# Altium PCB DigitalMaze.PcbDoc
Units mm, origin at the board's own origin, x right, y up, seen from the top; angles counter-clockwise.
Board outline 40.1 x 40.1 mm, 2 copper layers (Top Layer, Bottom Layer); 17 components, 11 nets, 95 pads, 119 vias.
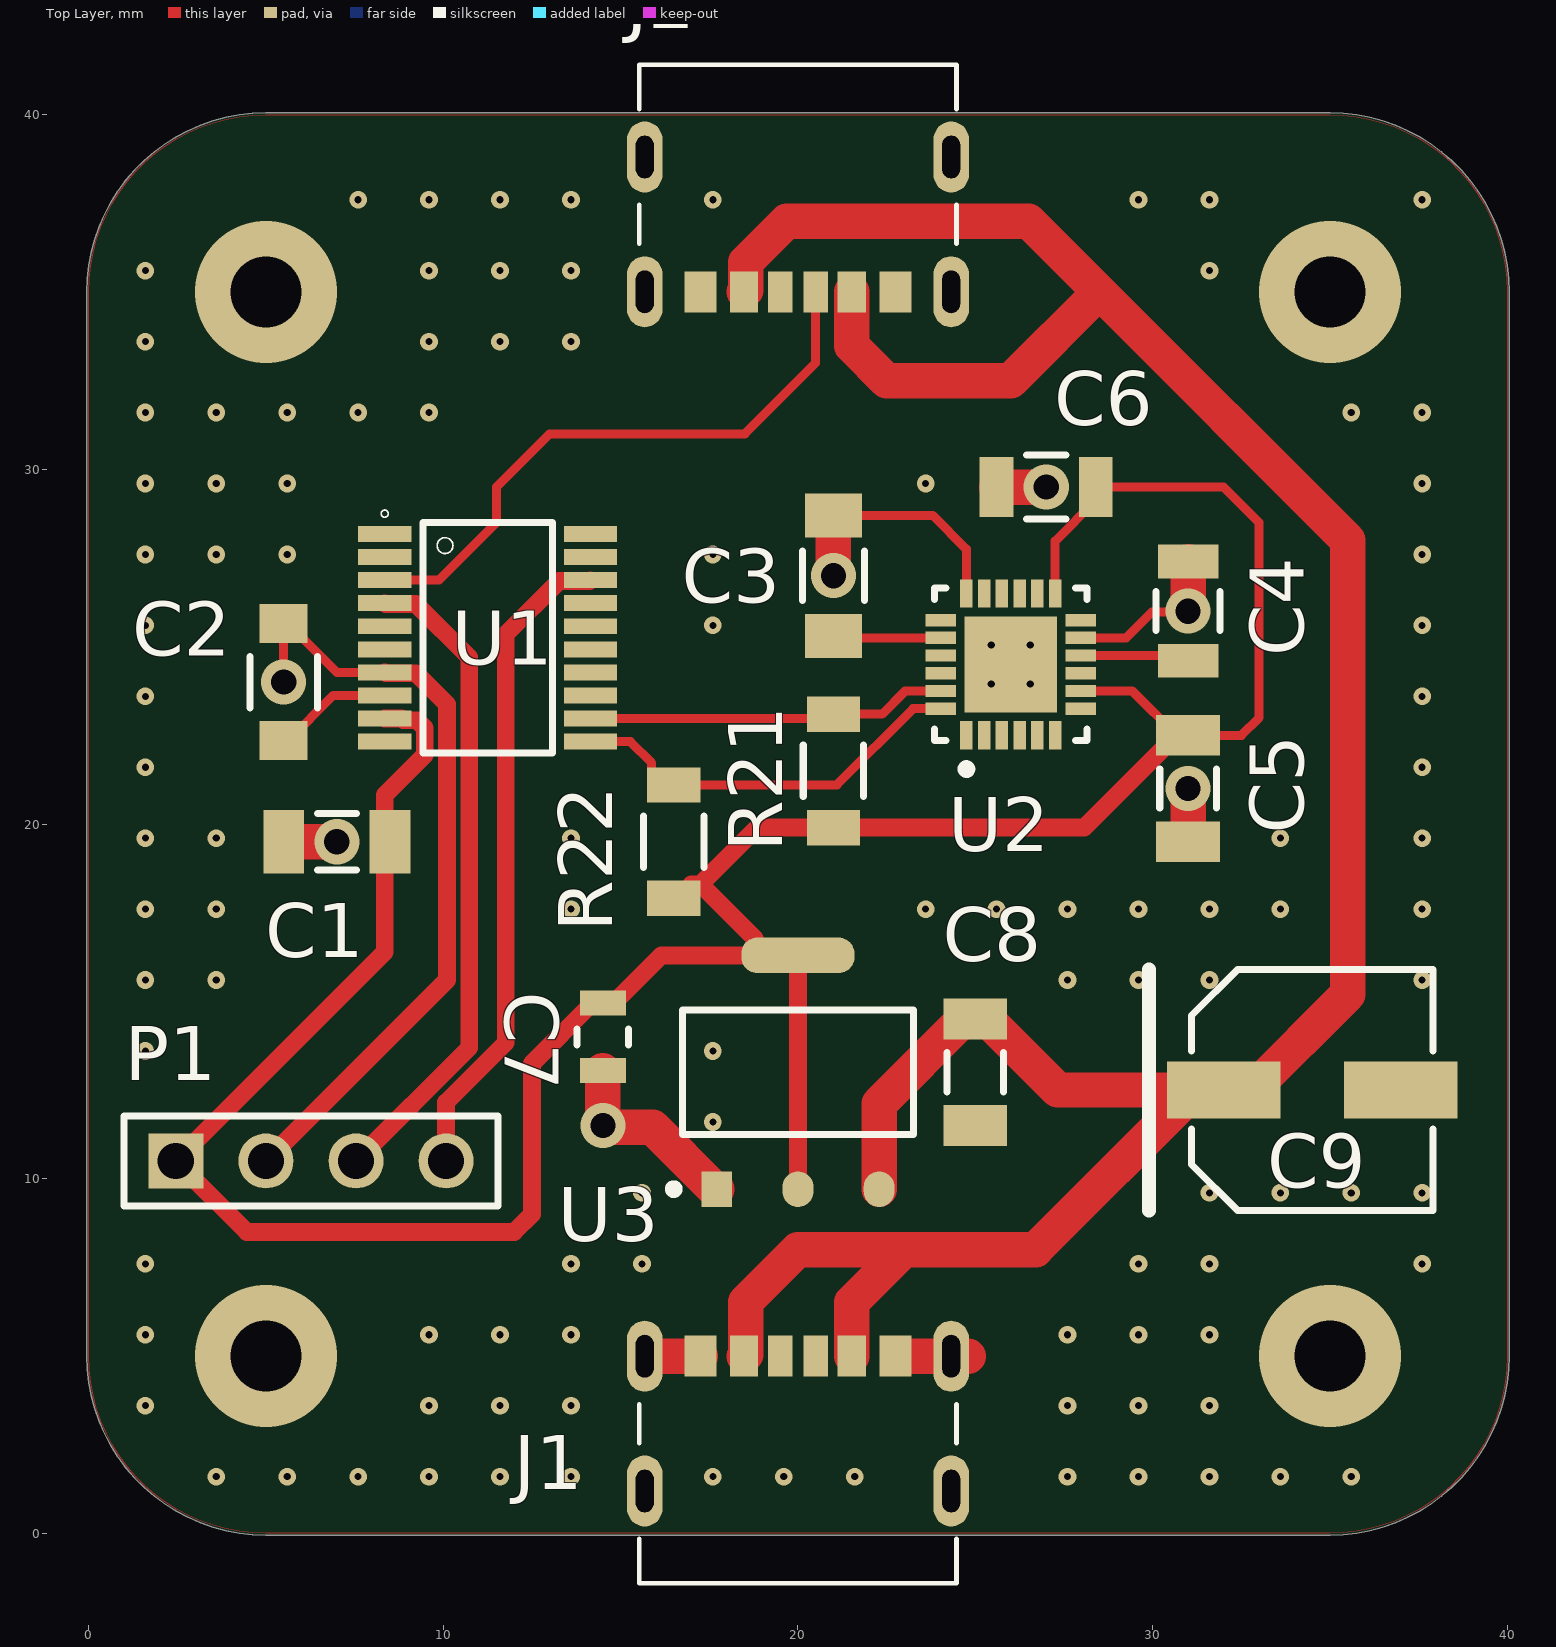
[diagram p0: Top Layer view]
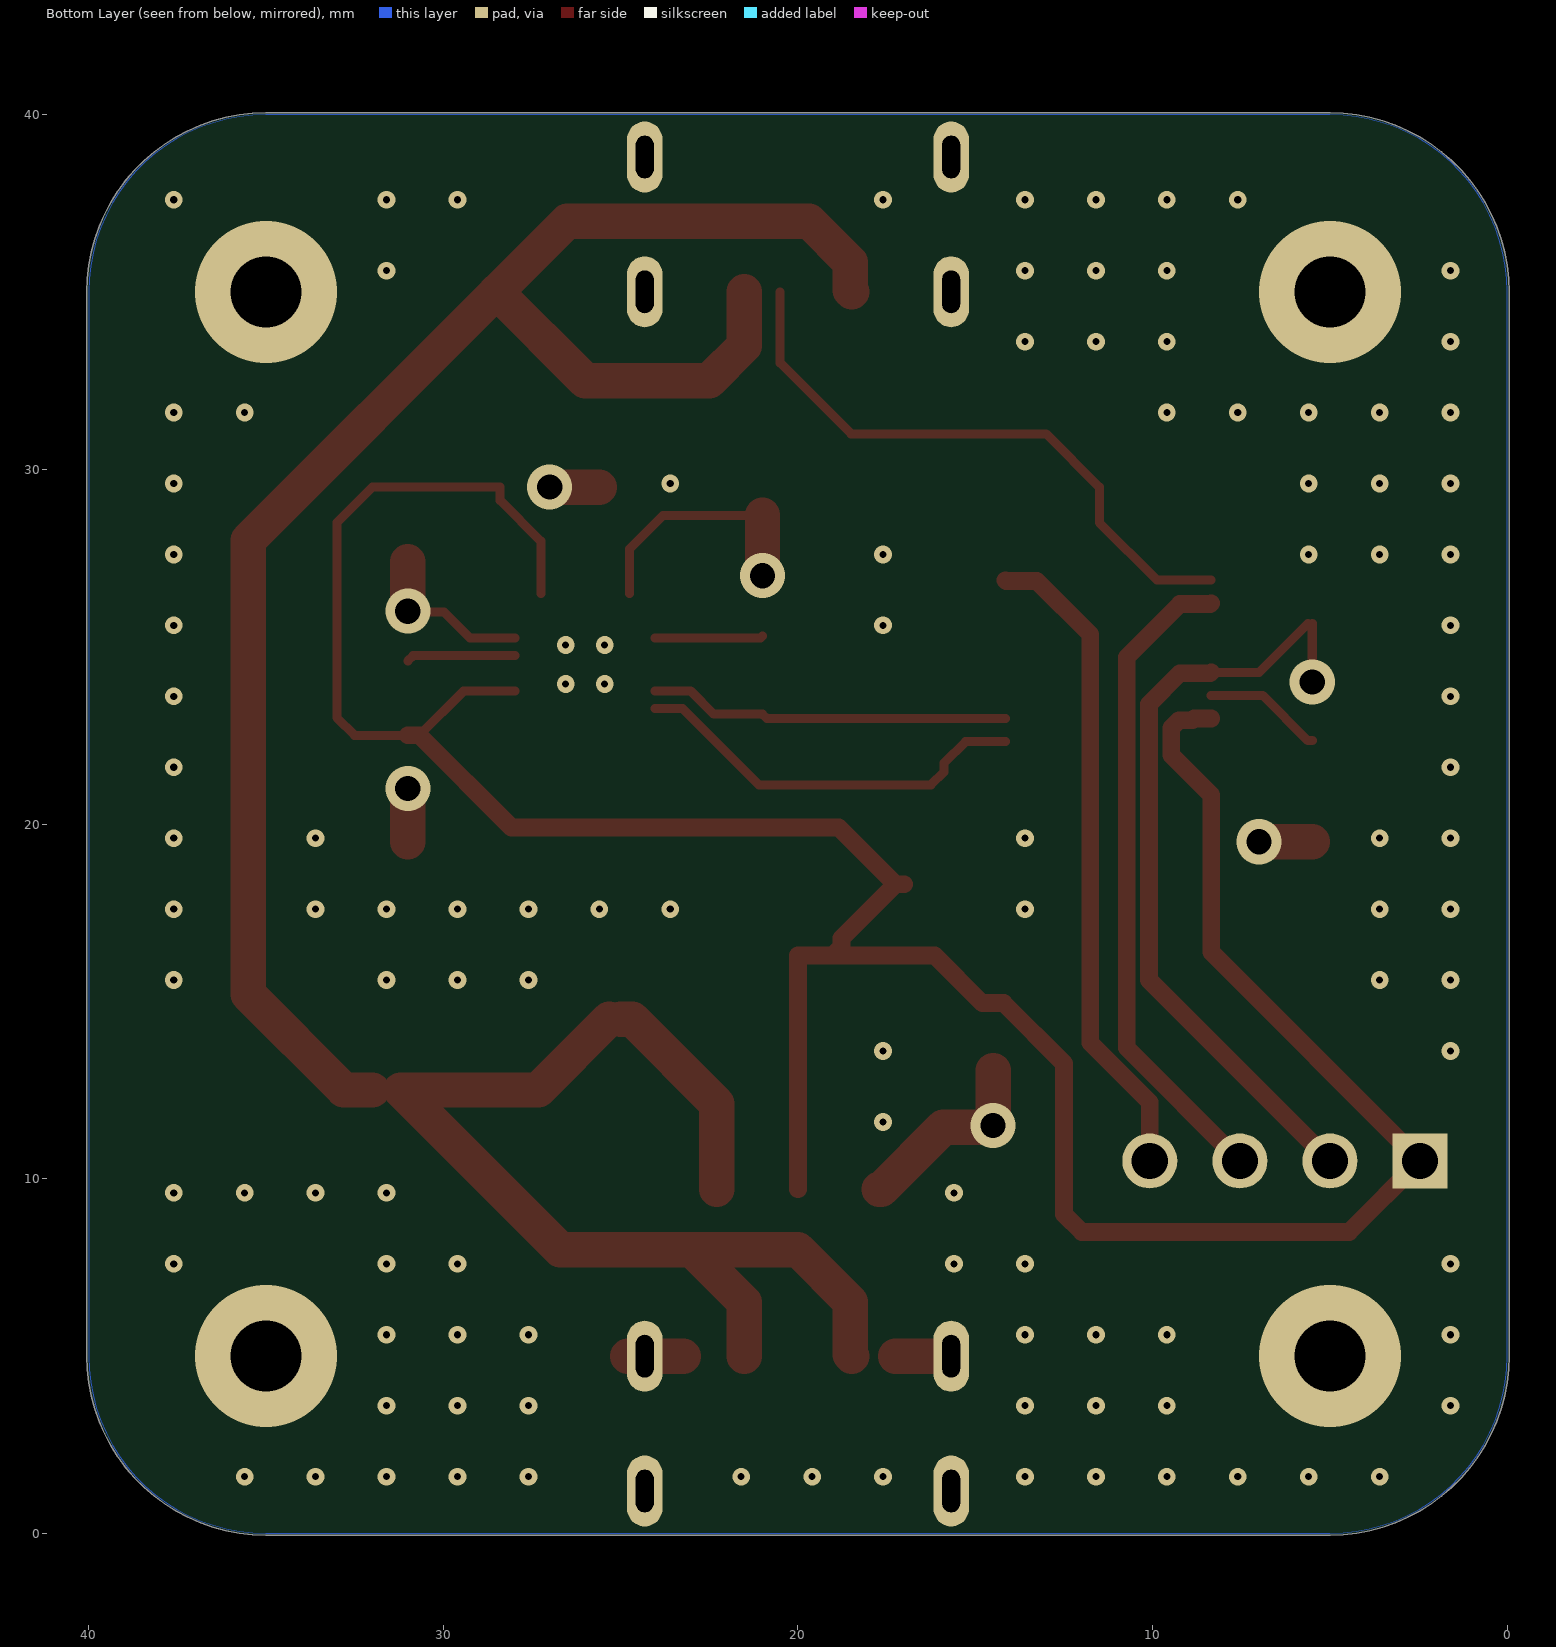
[diagram p1: Bottom Layer view, seen from below]

## Layer stack, top to bottom
Top Solder: solder mask 0.0102, Solder Resist, Dk 3.5
Top Layer: signal copper 0.0356
Dielectric 1: dielectric 0.32, FR-4, Dk 4.8
Bottom Layer: signal copper 0.0356
Bottom Solder: solder mask 0.0102, Solder Resist, Dk 3.5

## Board outline
-0.05,5 -0.05,35 cw(c5,35) 5,40.05 35,40.05 cw(c35,35) 40.05,35 40.05,5 cw(c35,5) 35,-0.05 5,-0.05 cw(c5,5)

## Design rules (kind name [scope] priority, off if disabled: settings)
AssemblyTestPointUsage [All] p0: scope1count=1 scope1_0_kind=Board scope1_0_value=Board scope2count=1 scope2_0_kind=Board scope2_0_value=Board commentlength=0
AssemblyTestpoint [All] p0: scope1count=1 scope1_0_kind=Board scope1_0_value=Board scope2count=1 scope2_0_kind=Board scope2_0_value=Board commentlength=0
Clearance [All] p0: scope1count=1 scope1_0_kind=Board scope1_0_value=Board scope2count=1 scope2_0_kind=Board scope2_0_value=Board commentlength=0 gap=0.127
Clearance [All] p1: gap=0.127 ignorepadtopadclearanceinfootprint=TRUE
ComponentClearance [All] p0: scope1count=1 scope1_0_kind=Board scope1_0_value=Board scope2count=1 scope2_0_kind=Board scope2_0_value=Board commentlength=0 gap=0.254 collisioncheckmode=3
DiffPairsRouting [All] p0: scope1count=1 scope1_0_kind=Board scope1_0_value=Board scope2count=1 scope2_0_kind=Board scope2_0_value=Board commentlength=0
FabricationTestPointUsage [All] p0: scope1count=1 scope1_0_kind=Board scope1_0_value=Board scope2count=1 scope2_0_kind=Board scope2_0_value=Board commentlength=0 valid=0 allowmultiple=FALSE
FabricationTestpoint [All] p0: scope1count=1 scope1_0_kind=Board scope1_0_value=Board scope2count=1 scope2_0_kind=Board scope2_0_value=Board commentlength=0 side=3 testpointundercomponent=TRUE minsize=1.016 maxsize=2.54 preferedsize=1.524 minholesize=0 maxholesize=1.016 preferedholesize=0.813 testpointgrid=0.025
FanoutControl Fanout_BGA [All] p0 off: scope1count=1 scope1_0_kind=Board scope1_0_value=Board scope2count=1 scope2_0_kind=Board scope2_0_value=Board commentlength=69 // Protel DXP Scope 1 Expression Was: IsBGA   Fanout_BGA (Default Rule)
FanoutControl Fanout_LCC [All] p0 off: scope1count=1 scope1_0_kind=Board scope1_0_value=Board scope2count=1 scope2_0_kind=Board scope2_0_value=Board commentlength=69 // Protel DXP Scope 1 Expression Was: IsLCC   Fanout_LCC (Default Rule)
FanoutControl Fanout_SOIC [All] p0 off: scope1count=1 scope1_0_kind=Board scope1_0_value=Board scope2count=1 scope2_0_kind=Board scope2_0_value=Board commentlength=71 // Protel DXP Scope 1 Expression Was: IsSOIC   Fanout_SOIC (Default Rule)
FanoutControl Fanout_Small [All] p0 off: scope1count=1 scope1_0_kind=Board scope1_0_value=Board scope2count=1 scope2_0_kind=Board scope2_0_value=Board commentlength=84 // Protel DXP Scope 1 Expression Was: (CompPinCount < 5)   Fanout_Small (Default Rule)
FanoutControl Fanout_Default [All] p0: scope1count=1 scope1_0_kind=Board scope1_0_value=Board scope2count=1 scope2_0_kind=Board scope2_0_value=Board commentlength=30 // Fanout_Default (Default Rule)
Height [All] p0: scope1count=1 scope1_0_kind=Board scope1_0_value=Board scope2count=1 scope2_0_kind=Board scope2_0_value=Board commentlength=0
HoleSize [All] p0: scope1count=1 scope1_0_kind=Board scope1_0_value=Board scope2count=1 scope2_0_kind=Board scope2_0_value=Board commentlength=0 absolutevalues=TRUE maxlimit=2.54 minlimit=0.025 maxpercent=80.000 minpercent=20.000
HoleToHoleClearance [All] p0: scope1count=1 scope1_0_kind=Board scope1_0_value=Board scope2count=1 scope2_0_kind=Board scope2_0_value=Board commentlength=0
LayerPairs [All] p0: scope1count=1 scope1_0_kind=Board scope1_0_value=Board scope2count=1 scope2_0_kind=Board scope2_0_value=Board commentlength=0 enforce=TRUE
MinimumSolderMaskSliver [All] p0: scope1count=1 scope1_0_kind=Board scope1_0_value=Board scope2count=1 scope2_0_kind=Board scope2_0_value=Board commentlength=0
MinimumSolderMaskSliver [All] p1: minsoldermaskwidth=0.04
NetAntennae [All] p0: scope1count=1 scope1_0_kind=Board scope1_0_value=Board scope2count=1 scope2_0_kind=Board scope2_0_value=Board commentlength=0
PasteMaskExpansion [All] p0: scope1count=1 scope1_0_kind=Board scope1_0_value=Board scope2count=1 scope2_0_kind=Board scope2_0_value=Board commentlength=0 expansion=0
PlaneClearance [All] p0: scope1count=1 scope1_0_kind=Board scope1_0_value=Board scope2count=1 scope2_0_kind=Board scope2_0_value=Board commentlength=0 clearance=0.508
PlaneConnect [All] p0: scope1count=1 scope1_0_kind=Board scope1_0_value=Board scope2count=1 scope2_0_kind=Board scope2_0_value=Board commentlength=0 planeconnectstyle=Relief reliefexpansion=0.508 reliefentries=4 reliefconductorwidth=0.254 reliefairgap=0.254
PolygonConnect [All] p0: scope1count=1 scope1_0_kind=Board scope1_0_value=Board scope2count=1 scope2_0_kind=Board scope2_0_value=Board commentlength=0 connectstyle=Direct reliefconductorwidth=0.254 reliefentries=4 polygonreliefangle="90 Angle"
PolygonConnect [All] p1: connectstyle=Direct reliefconductorwidth=0.254 reliefentries=4 polygonreliefangle="90 Angle" airgapwidth=0.254
RoutingCorners [All] p0: scope1count=1 scope1_0_kind=Board scope1_0_value=Board scope2count=1 scope2_0_kind=Board scope2_0_value=Board commentlength=0 cornerstyle=45-Degree minsetback=2.54 maxsetback=2.54
RoutingLayers [All] p0: scope1count=1 scope1_0_kind=Board scope1_0_value=Board scope2count=1 scope2_0_kind=Board scope2_0_value=Board commentlength=0 top layer=Automatic bottom layer=Automatic
RoutingPriority [All] p0: scope1count=1 scope1_0_kind=Board scope1_0_value=Board scope2count=1 scope2_0_kind=Board scope2_0_value=Board commentlength=0
RoutingTopology [All] p0: scope1count=1 scope1_0_kind=Board scope1_0_value=Board scope2count=1 scope2_0_kind=Board scope2_0_value=Board commentlength=0 topology=Shortest
RoutingVias [All] p0: scope1count=1 scope1_0_kind=Board scope1_0_value=Board scope2count=1 scope2_0_kind=Board scope2_0_value=Board commentlength=0 holewidth=1 width=1 viastyle="Through Hole" minholewidth=0.5 minwidth=1 maxholewidth=2 maxwidth=4
RoutingVias [All] p1: holewidth=1 width=1 viastyle="Through Hole" minholewidth=0.5 minwidth=1 maxholewidth=2 maxwidth=4
ShortCircuit [All] p0: scope1count=1 scope1_0_kind=Board scope1_0_value=Board scope2count=1 scope2_0_kind=Board scope2_0_value=Board commentlength=0 allowed=FALSE
SilkToBoardRegionClearance [All] p0: scope1count=1 scope1_0_kind=Board scope1_0_value=Board scope2count=1 scope2_0_kind=Board scope2_0_value=Board commentlength=0
SilkToSilkClearance [All] p0: scope1count=1 scope1_0_kind=Board scope1_0_value=Board scope2count=1 scope2_0_kind=Board scope2_0_value=Board commentlength=0
SilkToSolderMaskClearance [All] p0 off: scope1count=1 scope1_0_kind=Board scope1_0_value=Board scope2count=1 scope2_0_kind=Board scope2_0_value=Board commentlength=44 // Protel DXP Scope 1 Expression Was: IsPad
SilkToSolderMaskClearance [IsPad] p1: minsilkscreentomaskgap=0.2 clearancetoexposedcopper=TRUE
SolderMaskExpansion [All] p0: scope1count=1 scope1_0_kind=Board scope1_0_value=Board scope2count=1 scope2_0_kind=Board scope2_0_value=Board commentlength=0 expansion=0.102
SolderMaskExpansion [All] p1: expansion=0.102 istentingtop=FALSE
SupplyNets "Schematic Supply Nets_2" [All] p0: scope1count=1 scope1_0_kind=Net scope1_0_value=VCC_3.3V scope2count=1 scope2_0_kind=Board scope2_0_value=Board commentlength=0 voltage=0.000
SupplyNets "Schematic Supply Nets_1" [All] p0: scope1count=1 scope1_0_kind=Net scope1_0_value=VCC_5V scope2count=1 scope2_0_kind=Board scope2_0_value=Board commentlength=0 voltage=0.000
SupplyNets "Schematic Supply Nets" [All] p0: scope1count=1 scope1_0_kind=Net scope1_0_value=GND scope2count=1 scope2_0_kind=Board scope2_0_value=Board commentlength=0 voltage=0.000
SupplyNets "Schematic Supply Nets_2" [InNet('VCC_3.3V')] p1: voltage=0.000
SupplyNets "Schematic Supply Nets_1" [InNet('VCC_5V')] p2: voltage=0.000
SupplyNets "Schematic Supply Nets" [InNet('GND')] p3: voltage=0.000
UnRoutedNet [All] p0: scope1count=1 scope1_0_kind=Board scope1_0_value=Board scope2count=1 scope2_0_kind=Board scope2_0_value=Board commentlength=0
UnpouredPolygon [All] p0: scope1count=1 scope1_0_kind=Board scope1_0_value=Board scope2count=1 scope2_0_kind=Board scope2_0_value=Board commentlength=0
Width [All] p0: scope1count=1 scope1_0_kind=Board scope1_0_value=Board scope2count=1 scope2_0_kind=Board scope2_0_value=Board commentlength=0 maxlimit=1 minlimit=0.254 preferedwidth=0.5
Width [All] p1: maxlimit=1 minlimit=0.254 preferedwidth=0.5
28 further rules are at their usual default settings.

## Components (designator, comment, footprint, x,y, rotation, side; value= is the part's Value field where it differs from the comment)
C1 "10nF" CAPC1206(3216)150_N 7,19.5 r0 top
C2 "1uF" FP-CGA5L-0_3-0_1-MFG 5.5,24 r90 top
C3 "2.2uF" FP-1206-L_3_2_0_15-W_1_6-MFG 21,27 r90 top
C4 "100nF" FP-C1206C-EB-MFG 31,26 r90 top
C5 "10nF" CAPC1206(3216)150_N 31,21 r90 top
C6 "100nF" FP-C1206C-EB-MFG 27,29.5 r0 top
C7 "22uF" FP-GRM21B-0_2-e0_2_0_7-MFG 14.5,14 r270 top
C8 "10uF" CAPC1206(3216)190_N 25,13 r90 top
C9 "100uF" PNSC-FK-V-D8_V 34.5,12.5 r0 top
J1 "" CUI_UJC-HP-3-SMT-TR 20,4.995 r0 top
J2 "UJC-HP-3-SMT-TR" CUI_UJC-HP-3-SMT-TR 20,35.005 r180 top
P1 "TSW-104-08-G-S" SMTC-TSW-104-08-X-S 2.46,10.5 r0 top
R21 "10k" FP-RT1206-MFG 21,21.5 r90 top
R22 "10k" FP-RT1206-MFG 16.5,19.5 r90 top
U1 "STM8S103F3P6" SOP65P640X120-20N 11.25,25.25 r0 top locked
U2 "MPU-6050" IS-QFN-24_V 26,24.5 r90 top
U3 "AMS1117-3.3" FP-AMS1117-IPC_C 20,13 r90 top

## Footprints (in the part's own frame and the unit in brackets; to place one, negate y for a bottom-side part, rotate by r counter-clockwise, add the part's x,y. Pads: shape width x height; smd on the part's side, far side on the other; paste and mask are expansions set on the pad)
CAPC1206(3216)150_N [mm] "Chip Capacitor, Body 3.2x1.6mm, Height 1.5mm, IPC Medium Density"
  rect 1.15x1.8 smd: 1(-1.5,0) 2(1.5,0)
  silkscreen extent -0.55,-0.8 0.55,0.8
CAPC1206(3216)190_N [mm] "Chip Capacitor, Body 3.2x1.6mm, Height 1.9mm, IPC Medium Density"
  rect 1.15x1.8 smd: 1(-1.5,0) 2(1.5,0)
  silkscreen extent -0.55,-0.8 0.55,0.8
CUI_UJC-HP-3-SMT-TR [mm]
  rect 0.7x1.15 smd: A5(-0.5,0.005) B5(0.5,0.005)
  rect 0.8x1.15 smd: A9(1.52,0.005) B9(-1.52,0.005)
  rect 0.9x1.15 smd: A12(2.75,0.005) B12(-2.75,0.005)
  oval 1x2 hole 0.5 slot 1.2 at 90 deg: S1(-4.32,0) S2(4.32,0) S3(-4.32,-3.8) S4(4.32,-3.8)
  silkscreen extent -4.47,-6.4 4.47,-1.35
FP-1206-L_3_2_0_15-W_1_6-MFG [mm]
  rect 1.25x1.6 smd paste+0 mask+0: 1(-1.7,0) 2(1.7,0)
  silkscreen extent -0.7,-0.87 0.7,0.87
FP-AMS1117-IPC_C [mm]
  rect 1.004x0.872 smd paste+0 mask+0: 1(-3.295,2.29)
  rrect100% 1.004x0.872 smd paste+0 mask+0: 2(-3.295,0) 3(-3.295,-2.29)
  rrect87% 1.004x3.182 smd paste+0 mask+0: 4(3.295,0)
  silkscreen extent -3.42,-3.25 1.75,3.62
FP-C1206C-EB-MFG [mm]
  rect 0.95x1.7 smd paste+0 mask+0: 1(-1.4,0) 2(1.4,0)
  silkscreen extent -0.55,-0.9 0.55,0.9
FP-CGA5L-0_3-0_1-MFG [mm]
  rect 1.1x1.35 smd paste+0 mask+0: 1(-1.65,0) 2(1.65,0)
  silkscreen extent -0.72,-0.95 0.72,0.95
FP-GRM21B-0_2-e0_2_0_7-MFG [mm]
  rect 0.7x1.3 smd paste+0 mask+0: 1(-0.95,0) 2(0.95,0)
  silkscreen extent -0.23,-0.72 0.23,0.72
FP-RT1206-MFG [mm]
  rect 1x1.5 smd paste+0 mask+0: 1(-1.6,0) 2(1.6,0)
  silkscreen extent -0.72,-0.85 0.72,0.85
IS-QFN-24_V [mm] "QFN, 24-Leads, Body 4x4mm, Pitch 0.5mm, Thermal Pad 2.7x2.6mm"
  rect 0.8x0.35 smd: 1(-2,1.25) 2(-2,0.75) 3(-2,0.25) 4(-2,-0.25) 5(-2,-0.75) 6(-2,-1.25) 13(2,-1.25) 14(2,-0.75) 15(2,-0.25) 16(2,0.25) 17(2,0.75) 18(2,1.25)
  rect 0.35x0.85 smd mask+0: 7(-1.25,-1.975) 8(-0.75,-1.975) 9(-0.25,-1.975) 10(0.25,-1.975) 11(0.75,-1.975) 12(1.25,-1.975) 19(1.25,1.975) 20(0.75,1.975) 21(0.25,1.975) 22(-0.25,1.975) 23(-0.75,1.975) 24(-1.25,1.975)
  rect 2.7x2.6 smd: 25(0,0)
  silkscreen extent -3.07,-2.15 2.15,2.15
PNSC-FK-V-D8_V [mm] "CAPAE, 2-Leads, Body 6.80x6.80mm"
  rect 3.2x1.6 smd: 1(-2.5,0) 2(2.5,0)
  silkscreen extent -4.6,-3.4 3.4,3.4
SMTC-TSW-104-08-X-S [mm] ".025 SQ Post Terminal Strip Assembly, 1x4 Pins, Vertical, 2.54mm Pitch, Male"
  rect 1.55x1.55 hole 1.02: 1(0,0)
  round 1.55 hole 1.02: 2(2.54,0) 3(5.08,0) 4(7.62,0)
  silkscreen extent -1.46,-1.27 9.08,1.27
SOP65P640X120-20N [mm]
  rect 1.5x0.45 smd: 1(-2.9,2.925) 2(-2.9,2.275) 3(-2.9,1.625) 4(-2.9,0.975) 5(-2.9,0.325) 6(-2.9,-0.325) 7(-2.9,-0.975) 8(-2.9,-1.625) 9(-2.9,-2.275) 10(-2.9,-2.925) 11(2.9,-2.925) 12(2.9,-2.275) 13(2.9,-1.625) 14(2.9,-0.975) 15(2.9,-0.325) 16(2.9,0.325) 17(2.9,0.975) 18(2.9,1.625) 19(2.9,2.275) 20(2.9,2.925)
  silkscreen extent -3,-3.25 1.83,3.6

## Part data
C1 C5: library part CMP-1037-03492-1, "CAP 10nF 25V ±10% 1206 (3216 Metric) Thickness 1.45mm SMD"
C2: library part CMP-08246-001699-1, "Cap Ceramic 1uF 25V X7R 10% Pad SMD 1206 +125°C Automotive T/R"
C3: library part CMP-14477-002875-2, "None"
C4 C6: library part CMP-03020-018297-1, "C1206 0.10 ?F U2J 20.00% 50 V"
C7: library part CMP-06035-036790-1, "Chip Multilayer Ceramic Capacitors for General Purpose, 0805, 22uF, X5R, 15%, 20%, 25V"
C8: library part CMP-1037-04980-1, "CAP 10uF 25V ±20% 1206 (3216 Metric) Thickness 1.9mm SMD"
C9: library part CMP-2000-06206-1, "Aluminum Electrolytic Capacitor, 100 uF, +/- 20%, 25 V, 2-Pin SMD (Size Code D8), -55 to 105 degC, RoHS, Tape and Reel"
J1: library part UJC-HP-3-SMT-TR
P1: library part CMP-1024-00357-1, "0.025\" SQ Post Header, Through-hole, Vertical, -55 to 125 degC, 2.54 mm Pitch, 4-Pin, Male, RoHS"
R21 R22: library part CMP-03412-025078-1, "RES SMD 10K OHM 0.1% 1/4W 1206"
U1: "STM8 series Microcontroller IC 8-Bit 16MHz 8KB (8K x 8) FLASH 20-TSSOP"
U2: library part CMP-1753-00002-2, "3-Axis Gyroscope, Accelerometer and a Digital Motion Processor(TM) (DMP), 2.375 to 3.46 V, -40 to 85 degC, 24-Pin QFN, RoHS, Tape and Reel"
U3: library part CMP-209535-000001-1, "LDO Voltage Regulators 1A, 3.3V"

## Via types
v1: diameter 0.5, hole 0.2, Top Layer to Bottom Layer, 108 vias
v2: diameter 1.27, hole 0.711, Top Layer to Bottom Layer, tented top, 7 vias
v3: diameter 4, hole 2, Top Layer to Bottom Layer, tented both sides, 4 vias

## Nets (pads, with @x,y where several pads share a name; then routed paths per layer and width w, separated by ;. In a path a pad name is that pad's centre, name@x,y a point inside that pad or via, vN(x,y) a via of type N, cw(c..) or ccw(c..) an arc to the next point about the centre after c; other vN are vias at no path point)
GND: C1.1 C2.2 C3.2 C4.2 C5.1 C6.1 C7.2 C8.1 C9.2 J1.A12 J1.B12 J1.S1 J1.S2 J1.S3 J1.S4 J2.A12 J2.B12 J2.S1 J2.S2 J2.S3 J2.S4 P1.2 U1.7 U2.1 U2.9 U2.11 U2.18 U2.25 U3.1 | length 46.9
  Top Layer w0.254: v2(5.5,24) C2.2 ; C2.2@5.625,25.65 7,24.275 U1.7 ; C3.2 23.8,28.7 24.75,27.75 U2.18 ; U2.11 29.25,25.25 29.984,25.984 30.984,25.984 v2(31,26)
  Top Layer w0.5: P1.2 10.104,15.604 10.104,23.379 9.233,24.25 8.375,24.25 U1.7
  Top Layer w1: C1.1 v2(7,19.5) ; C7.2 v2(14.5,11.5) 14.552,11.448 15.905,11.448 17.648,9.705 U3.1 ; J1.S1 15.68,4.998 17.248,4.998 J1.B12 ; v2(21,27) C3.2 ; 23.232,4.998 24.8,4.998 J1.S2@24.8,4.995 ; C6.1 v2(27,29.5) ; C5.1 v2(31,21) ; v2(31,26) C4.2
  other v1: 3.6,1.6 5.6,1.6 7.6,1.6 9.6,1.6 11.6,1.6 13.6,1.6 17.6,1.6 19.6,1.6 21.6,1.6 27.6,1.6 29.6,1.6 31.6,1.6 33.6,1.6 35.6,1.6 1.6,3.6 9.6,3.6 11.6,3.6 13.6,3.6 27.6,3.6 29.6,3.6 31.6,3.6 1.6,5.6 9.6,5.6 11.6,5.6 13.6,5.6 27.6,5.6 29.6,5.6 31.6,5.6 1.6,7.6 13.6,7.6 15.6,7.6 29.6,7.6 31.6,7.6 37.6,7.6 15.6,9.6 31.6,9.6 33.6,9.6 35.6,9.6 37.6,9.6 17.6,11.6 1.6,13.6 17.6,13.6 1.6,15.6 3.6,15.6 27.6,15.6 29.6,15.6 31.6,15.6 37.6,15.6 1.6,17.6 3.6,17.6 13.6,17.6 23.6,17.6 25.6,17.6 27.6,17.6 29.6,17.6 31.6,17.6 33.6,17.6 37.6,17.6 1.6,19.6 3.6,19.6 13.6,19.6 33.6,19.6 37.6,19.6 1.6,21.6 37.6,21.6 1.6,23.6 37.6,23.6 25.45,23.95 26.55,23.95 25.45,25.05 26.55,25.05 1.6,25.6 17.6,25.6 37.6,25.6 1.6,27.6 3.6,27.6 5.6,27.6 17.6,27.6 37.6,27.6 1.6,29.6 3.6,29.6 5.6,29.6 23.6,29.6 37.6,29.6 1.6,31.6 3.6,31.6 5.6,31.6 7.6,31.6 9.6,31.6 35.6,31.6 37.6,31.6 1.6,33.6 9.6,33.6 11.6,33.6 13.6,33.6 1.6,35.6 9.6,35.6 11.6,35.6 13.6,35.6 31.6,35.6 7.6,37.6 9.6,37.6 11.6,37.6 13.6,37.6 17.6,37.6 29.6,37.6 31.6,37.6 37.6,37.6
  other v3: 5,5 35,5 5,35 35,35
LED_VIN: J2.A5 U1.3 | length 17.3
  Top Layer w0.254: U1.3 9.875,26.875 11.5,28.5 11.5,29.5 13,31 18.5,31 20.5,33 J2.A5
NetC2_1: C2.1 U1.8 | length 3.4
  Top Layer w0.254: C2.1 5.625,22.35 6.9,23.625 U1.8
NetC3_1: C3.1 U2.20 | length 3
  Top Layer w0.254: C3.1 21.05,25.25 U2.20
NetC4_1: C4.1 U2.10 | length 3.1
  Top Layer w0.254: U2.10 30.85,24.75 C4.1
NRST: P1.3 U1.4 | length 18.5
  Top Layer w0.5: P1.3 10.731,13.691 10.731,24.702 9.233,26.2 8.375,26.2 U1.4
SCL: R21.2 U1.12 U2.23 | length 10.2
  Top Layer w0.254: U1.12 20.875,22.975 R21.2 22.374,23.1 23.024,23.75 U2.23
SDA: R22.2 U1.11 U2.24 | length 11.4
  Top Layer w0.254: U1.11 15.275,22.325 15.877,21.723 15.877,21.473 16.25,21.1 R22.2 21.1,21.1 23.25,23.25 U2.24
SWIM: P1.4 U1.18 | length 18.6
  Top Layer w0.5: P1.4 10.08,12.153 11.762,13.836 11.762,25.346 13.267,26.85 14.125,26.85 U1.18
VCC_3.3V: C1.2 C5.2 C6.2 C7.1 P1.1 R21.1 R22.1 U1.9 U2.8 U2.13 U3.2 U3.4 | length 84.9
  Top Layer w0.254: U2.13 27.25,27.975 28.4,29.125 C6.2 32,29.5 33,28.5 33,23 32.5,22.5 C5.2 ; U2.8 29.425,23.75 C5.2@30.675,22.5
  Top Layer w0.5: U1.9 8.825,22.975 8.873,22.927 9.256,22.927 9.477,22.706 9.477,21.944 8.35,20.817 8.35,16.39 P1.1 4.46,8.5 12,8.5 12.5,9 12.5,13.25 14.2,14.95 C7.1 14.8,14.95 16.145,16.295 U3.4@19.012,16.295 ; R22.1@17,18.3 R22.1@17.25,18.3 ; U3.2 U3.4 U3.4@19.012,16.295 ; C5.2 30.675,22.5 28.075,19.9 R21.1 18.85,19.9 R22.1@17.25,18.3 ; R22.1@17.25,18.3 18.774,16.776 18.774,16.533 U3.4@19.012,16.295
VCC_5V: C8.2 C9.1 J1.A9 J1.B9 J2.A9 J2.B9 U3.3 | length 82.5
  Top Layer w1: J1.B9 18.523,5.043 18.523,6.523 20,8 23,8 ; J2.A9 18.523,35.043 18.523,35.835 19.688,37 26.5,37 28.5,35 ; J1.A9 21.52,6.52 23,8 ; J2.B9 21.52,33.48 22.5,32.5 26,32.5 28.5,35 ; U3.3 22.29,12.115 24.675,14.5 C8.2 ; C8.2@25.325,14.5 27.325,12.5 31.2,12.5 26.7,8 23,8 ; C9.1 32.8,12.5 35.5,15.2 35.5,28 28.5,35
pads on no net: J1.A5 J1.B5 J2.B5 U1.1 U1.2 U1.5 U1.6 U1.10 U1.13 U1.14 U1.15 U1.16 U1.17 U1.19 U1.20 U2.2 U2.3 U2.4 U2.5 U2.6 U2.7 U2.12 U2.14 U2.15 U2.16 U2.17 U2.19 U2.21 U2.22

## Polygon pours and split planes (outlines as drawn)
GND on Bottom Layer "GND_L02_P001" (solid, pour order 1): 0,5 0,35 cw(c5,35) 5,40 35,40 cw(c35,35) 40,35 40,5 cw(c35,5) 35,0 5,0 cw(c5,5)
GND on Top Layer "GND_L01_P000" (solid, pour order 0): 0,5 0,35 cw(c5,35) 5,40 35,40 cw(c35,35) 40,35 40,5 cw(c35,5) 35,0 5,0 cw(c5,5)

## Silkscreen, mask and mechanical layers (free items; w line width, h text height)
Mechanical 1:
  lines w0.1: 0,5 ccw(c5,5) 5,0 ; 0,5 0,12.5 0,27.5 0,35 ; 0,5 5,0 ; 0,35 cw(c5,35) 5,40 ; 0,35 5,40 ; 5,0 35,0 ; 5,40 35,40 ; 35,0 ccw(c35,5) 40,5 ; 35,0 40,5 ; 35,40 cw(c35,35) 40,35 ; 35,40 40,35 ; 40,5 40,35 ; 46.5,5.25 ccw(c51.5,5.25) 51.5,0.25 81.5,0.25 ccw(c81.5,5.25) 86.5,5.25 86.5,35.25 ccw(c81.5,35.25) 81.5,40.25 51.5,40.25 ccw(c51.5,35.25) 46.5,35.25 46.5,27.75 46.5,12.75 46.5,5.25

## Text inside footprints (layer, text, board x,y; h text height)
J1: Top 3D Body "UJC-HP-3-SMT-TR" at 15.161,-3.959 h1.52